# Altium PCB portaDAC.PcbDoc
Units mm, origin at the board's own origin, x right, y up, seen from the top; angles counter-clockwise.
Board outline 93 x 93 mm, 4 copper layers (Top Layer, Mid Layer 1, Mid Layer 2, Bottom Layer), stack 1.65 mm thick; 5 components, 1 nets, 296 pads, 0 vias.
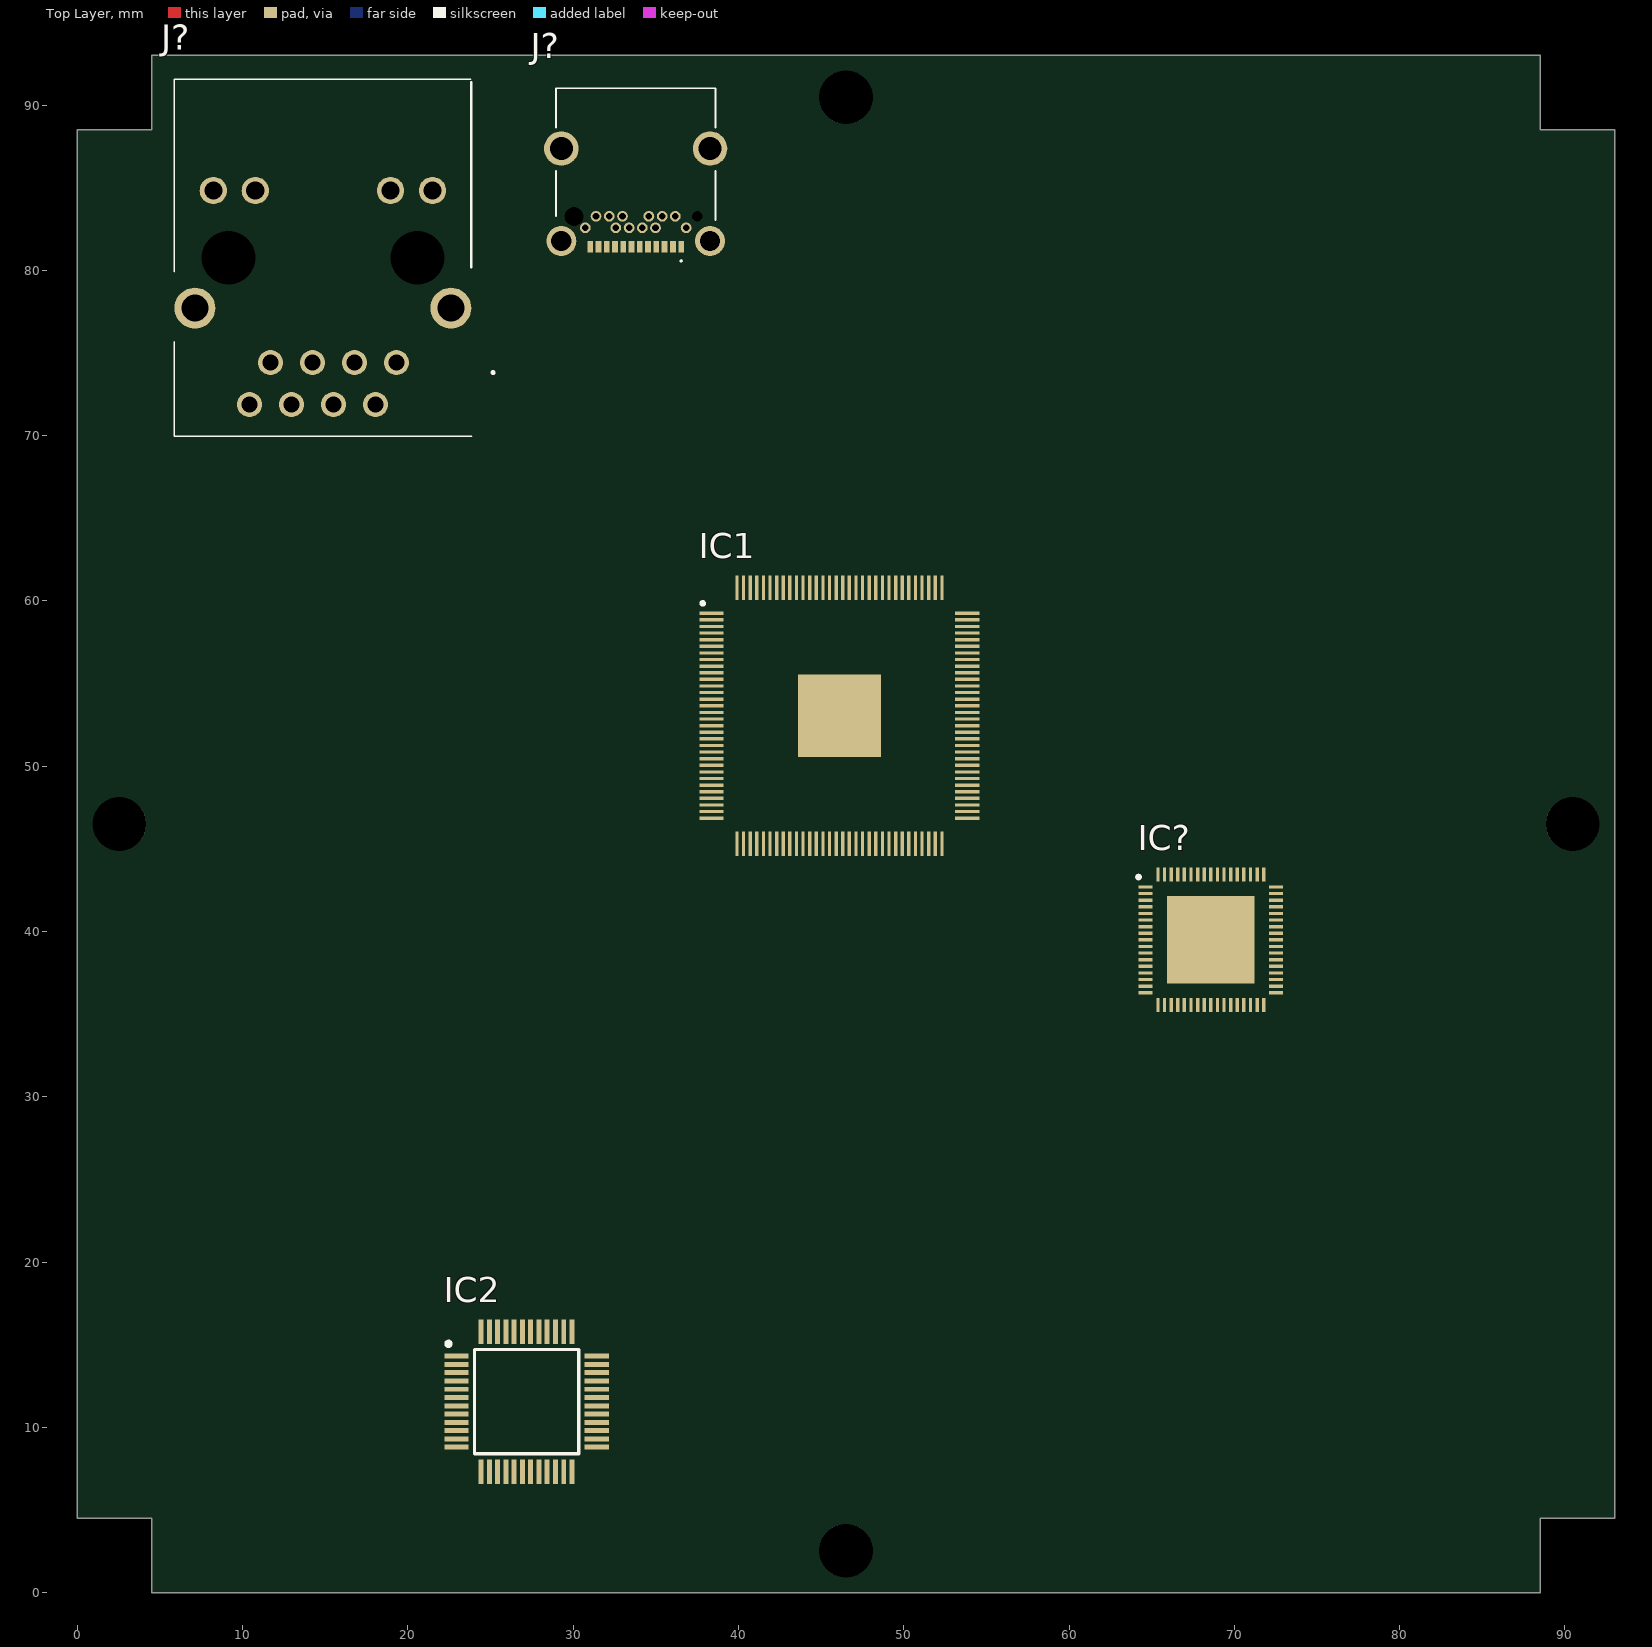
[diagram p0: Top Layer view]
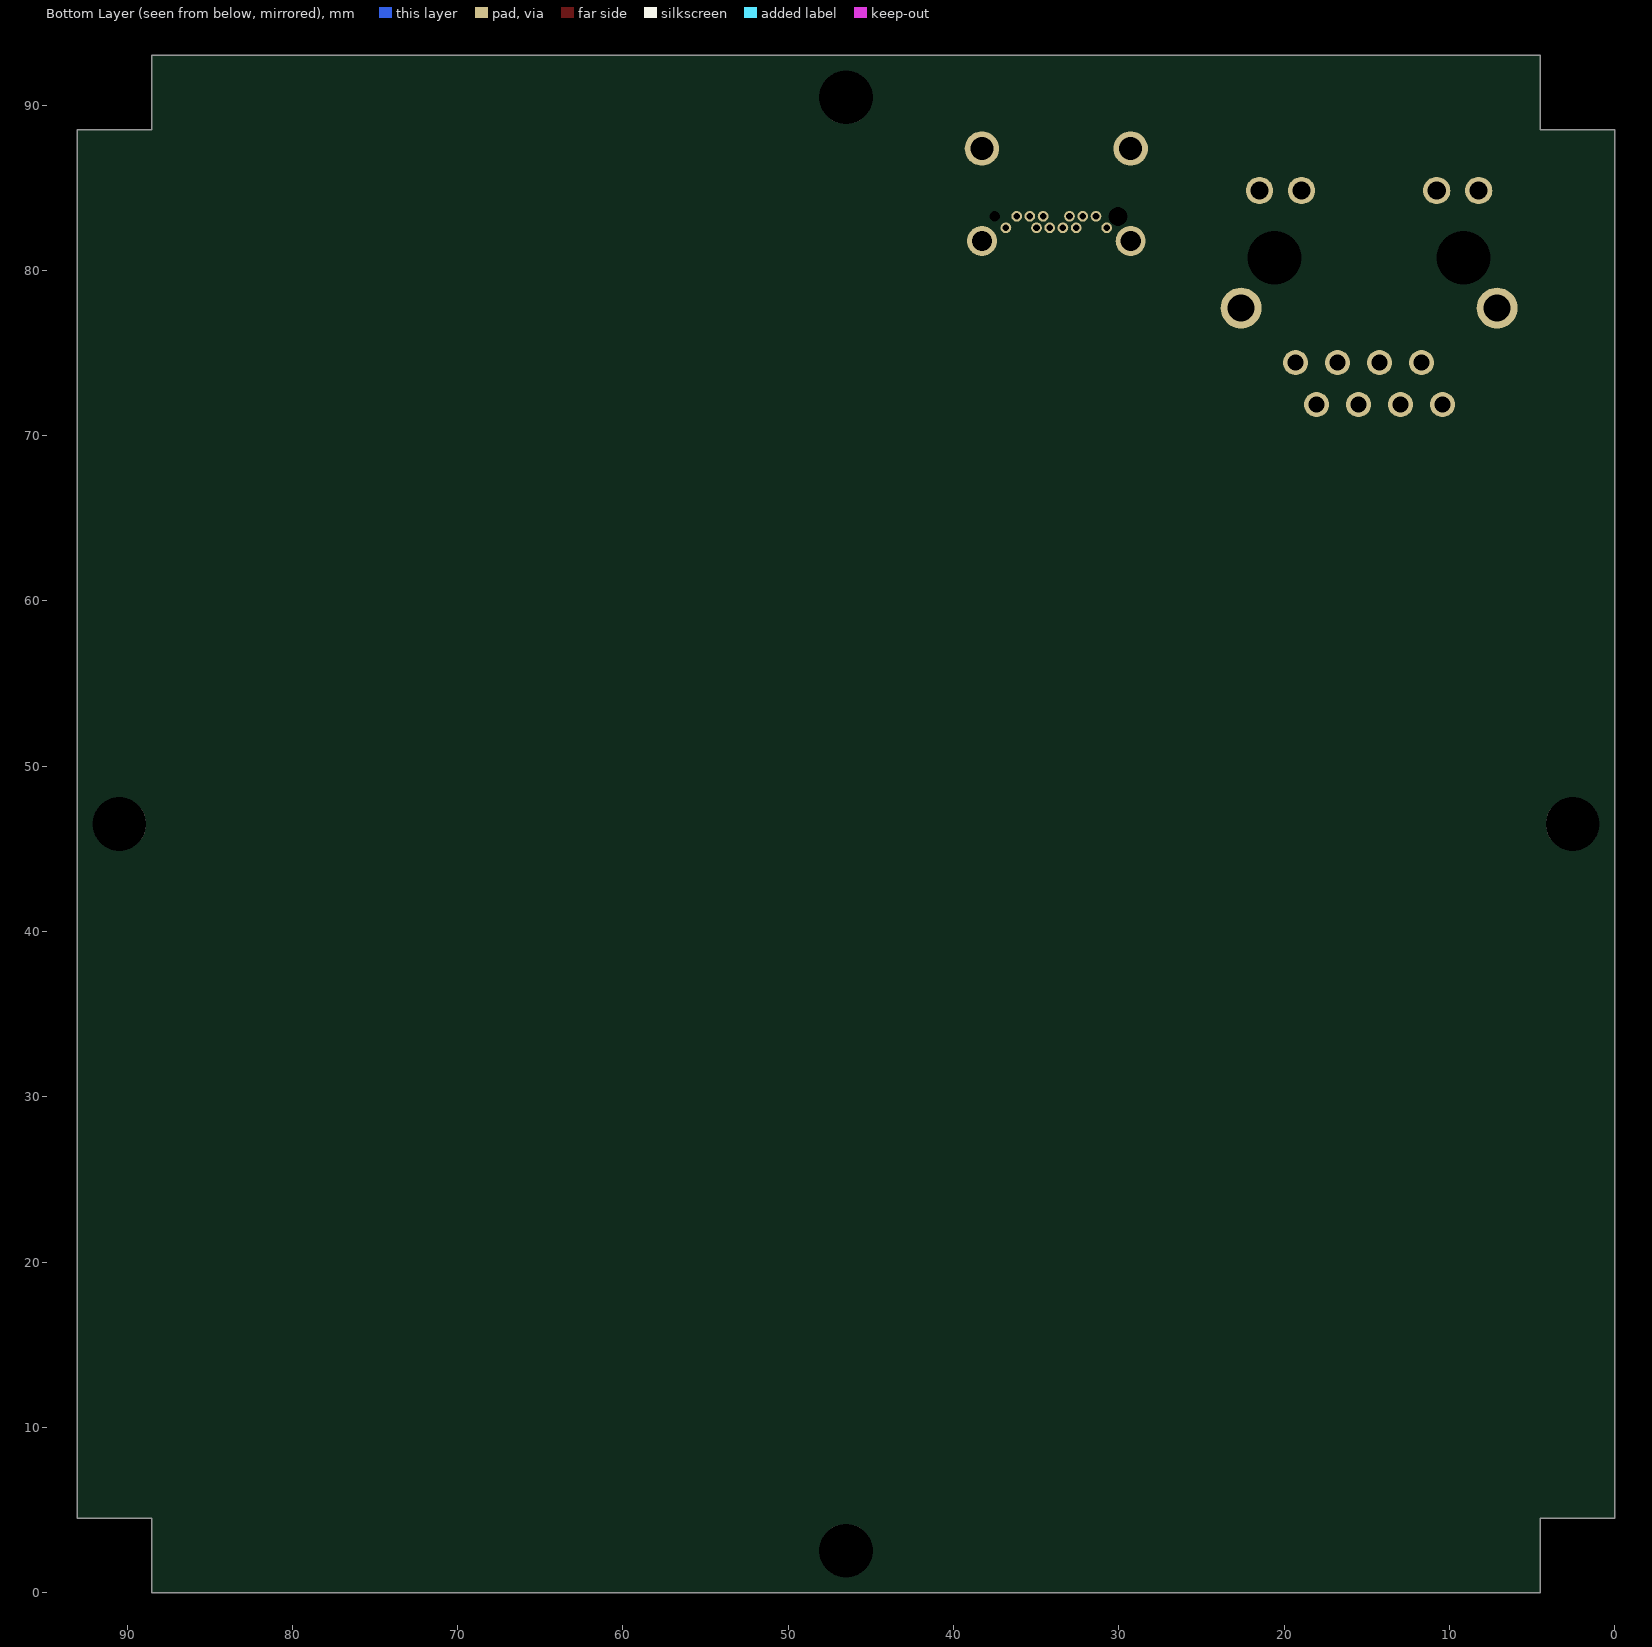
[diagram p1: Bottom Layer view, seen from below]

## Layer stack, top to bottom
Top Solder: solder mask 0.0127, Solder Resist, Dk 3.8
Top Layer: signal copper 0.075
Dielectric 1: prepreg 0.2, 7628, Dk 4.6
Mid Layer 1: signal copper 0.0175
Core: core 1.065, FR-4, Dk 4.5
Mid Layer 2: signal copper 0.0175
Dielectric 2: prepreg 0.2, 7628, Dk 4.6
Bottom Layer: signal copper 0.075
Bottom Solder: solder mask 0.0127, Solder Resist, Dk 3.8

## Board outline
4.506,0.006 4.506,4.506 0.006,4.506 0.006,88.506 4.506,88.506 4.506,93.006 88.506,93.006 88.506,88.506 93.006,88.506 93.006,4.506 88.506,4.506 88.506,0.006

## Design rules (kind name [scope] priority, off if disabled: settings)
BoardOutlineClearance [All] p1: gap=0.2 ignorepadtopadclearanceinfootprint=FALSE
Clearance ClearanceMidLayer1 [OnLayer('Mid Layer 1') Or IsVia Or IsThruPin vs OnLayer('Mid Layer 1')] p1: gap=0.102 ignorepadtopadclearanceinfootprint=FALSE except(0.127: Arc-Via Track-Via SMDPad-Via THPad-Via Via-Via Via-Fill Via-Poly Via-Region Via-Text; 0.25: Arc-Hole Track-Hole SMDPad-Hole THPad-Hole Via-Hole Fill-Hole Poly-Hole Region-Hole Text-Hole)
Clearance ClearanceTopLayer [OnLayer('Top Layer') Or IsVia Or IsThruPin vs OnLayer('Top Layer') Or IsVia Or IsThruPin] p2: gap=0.203 ignorepadtopadclearanceinfootprint=FALSE except(0.25: Arc-Hole Track-Hole SMDPad-Hole THPad-Hole Via-Hole Fill-Hole Poly-Hole Region-Hole Text-Hole)
Clearance ClearanceBottomLayer [OnLayer('Bottom Layer') Or IsVia Or IsThruPin vs OnLayer('Bottom Layer') Or IsVia Or IsThruPin] p3: gap=0.203 ignorepadtopadclearanceinfootprint=FALSE except(0.25: Arc-Hole Track-Hole SMDPad-Hole THPad-Hole Via-Hole Fill-Hole Poly-Hole Region-Hole Text-Hole)
Clearance ClearanceMidLayer2 [OnLayer('Mid Layer 2') Or IsVia Or IsThruPin vs OnLayer('Mid Layer 2')] p4: gap=0.102 ignorepadtopadclearanceinfootprint=FALSE except(0.127: Arc-Via Track-Via SMDPad-Via THPad-Via Via-Via Via-Fill Via-Poly Via-Region Via-Text; 0.25: Arc-Hole Track-Hole SMDPad-Hole THPad-Hole Via-Hole Fill-Hole Poly-Hole Region-Hole Text-Hole)
ComponentClearance [All] p1: gap=0.102 collisioncheckmode=3 verticalgap=0.102 showdistances=TRUE
DiffPairsRouting [All] p1: maxlimit=0.203 minlimit=0.102 mostfreqgap=0.203 toplayer_mingap=0.203 toplayer_minwidth=0.203 toplayer_maxwidth=1816.048 toplayer_prefwidth=0.203 midlayer1_maxgap=0.102 midlayer1_prefgap=0.102 midlayer1_minwidth=0.102 midlayer1_maxwidth=1816.048 midlayer1_prefwidth=0.102 midlayer2_maxgap=0.102 midlayer2_prefgap=0.102 midlayer2_minwidth=0.102 midlayer2_maxwidth=1816.048 midlayer2_prefwidth=0.102 bottomlayer_mingap=0.203 bottomlayer_minwidth=0.203 bottomlayer_maxwidth=1816.048 bottomlayer_prefwidth=0.203 maxuncoupledlength=12.7
Height [All] p1: minheight=0 maxheight=1816.048 prefheight=12.7
HoleSize [All] p1: absolutevalues=TRUE maxlimit=6.3 minlimit=0.2 maxpercent=80.000 minpercent=20.000
HoleToHoleClearance [All] p1: gap=0.25 allowstackedmicrovias=FALSE
MinimumAnnularRing [All] p1: minimumring=0.076
MinimumSolderMaskSliver [All] p1: minsoldermaskwidth=0
PlaneClearance PlaneClearanceMidLayer1 [OnLayer('Mid Layer 1')] p1: clearance=0.102
PlaneClearance PlaneClearanceMidLayer2 [OnLayer('Mid Layer 2')] p2: clearance=0.102
PlaneClearance PlaneClearanceTopLayer [OnLayer('Top Layer')] p3: clearance=0.203
PlaneClearance PlaneClearanceBottomLayer [OnLayer('Bottom Layer')] p4: clearance=0.203
PlaneConnect PlaneConnectPowerPads [InPadClass('PowerPads')] p1: planeconnectstyle=Direct reliefexpansion=0.508 reliefentries=4 reliefconductorwidth=0.254 reliefairgap=0.254
PlaneConnect PlaneConnectTopLayer [OnLayer('Top Layer')] p2: pad.planeconnectstyle=Relief pad.reliefexpansion=0.3 pad.reliefentries=4 pad.reliefconductorwidth=0.203 pad.reliefairgap=0.203 via.planeconnectstyle=Direct via.reliefexpansion=0.3 via.reliefentries=4 via.reliefconductorwidth=0.127 via.reliefairgap=0.127
PlaneConnect PlaneConnectBottomLayer [OnLayer('Bottom Layer')] p3: pad.planeconnectstyle=Relief pad.reliefexpansion=0.3 pad.reliefentries=4 pad.reliefconductorwidth=0.203 pad.reliefairgap=0.203 via.planeconnectstyle=Direct via.reliefexpansion=0.3 via.reliefentries=4 via.reliefconductorwidth=0.127 via.reliefairgap=0.127
PlaneConnect PlaneConnectMidLayer1 [OnLayer('Mid Layer 1')] p4: pad.planeconnectstyle=Relief pad.reliefexpansion=0.3 pad.reliefentries=4 pad.reliefconductorwidth=0.102 pad.reliefairgap=0.102 via.planeconnectstyle=Direct via.reliefexpansion=0.3 via.reliefentries=4 via.reliefconductorwidth=0.127 via.reliefairgap=0.127
PlaneConnect PlaneConnectMidLayer2 [OnLayer('Mid Layer 2')] p5: pad.planeconnectstyle=Relief pad.reliefexpansion=0.3 pad.reliefentries=4 pad.reliefconductorwidth=0.102 pad.reliefairgap=0.102 via.planeconnectstyle=Direct via.reliefexpansion=0.3 via.reliefentries=4 via.reliefconductorwidth=0.127 via.reliefairgap=0.127
PolygonConnect PolygonConnectPowerPads [All vs (InPadClass('PowerPads'))] p1: connectstyle=Direct reliefconductorwidth=0.254 reliefentries=4 polygonreliefangle="90 Angle" airgapwidth=0.254
PolygonConnect PolygonConnectMidLayer1 [OnLayer('Mid Layer 1') vs OnLayer('Mid Layer 1')] p2: thpad.connectstyle=Relief thpad.reliefconductorwidth=0.102 thpad.reliefentries=4 thpad.polygonreliefangle="90 Angle" thpad.airgapwidth=0.102 smdpad.connectstyle=Relief smdpad.reliefconductorwidth=0.102 smdpad.reliefentries=4 smdpad.polygonreliefangle="90 Angle" smdpad.airgapwidth=0.102 via.connectstyle=Direct via.reliefconductorwidth=0.127 via.reliefentries=4 via.polygonreliefangle="90 Angle" via.airgapwidth=0.127
PolygonConnect PolygonConnectMidLayer2 [OnLayer('Mid Layer 2') vs OnLayer('Mid Layer 2')] p3: thpad.connectstyle=Relief thpad.reliefconductorwidth=0.102 thpad.reliefentries=4 thpad.polygonreliefangle="90 Angle" thpad.airgapwidth=0.102 smdpad.connectstyle=Relief smdpad.reliefconductorwidth=0.102 smdpad.reliefentries=4 smdpad.polygonreliefangle="90 Angle" smdpad.airgapwidth=0.102 via.connectstyle=Direct via.reliefconductorwidth=0.127 via.reliefentries=4 via.polygonreliefangle="90 Angle" via.airgapwidth=0.127
PolygonConnect PolygonConnectTopLayer [OnLayer('Top Layer') vs OnLayer('Top Layer')] p4: thpad.connectstyle=Relief thpad.reliefconductorwidth=0.203 thpad.reliefentries=4 thpad.polygonreliefangle="90 Angle" thpad.airgapwidth=0.203 smdpad.connectstyle=Relief smdpad.reliefconductorwidth=0.203 smdpad.reliefentries=4 smdpad.polygonreliefangle="90 Angle" smdpad.airgapwidth=0.203 via.connectstyle=Direct via.reliefconductorwidth=0.127 via.reliefentries=4 via.polygonreliefangle="90 Angle" via.airgapwidth=0.127
PolygonConnect PolygonConnectBottomLayer [OnLayer('Bottom Layer') vs OnLayer('Bottom Layer')] p5: thpad.connectstyle=Relief thpad.reliefconductorwidth=0.203 thpad.reliefentries=4 thpad.polygonreliefangle="90 Angle" thpad.airgapwidth=0.203 smdpad.connectstyle=Relief smdpad.reliefconductorwidth=0.203 smdpad.reliefentries=4 smdpad.polygonreliefangle="90 Angle" smdpad.airgapwidth=0.203 via.connectstyle=Direct via.reliefconductorwidth=0.127 via.reliefentries=4 via.polygonreliefangle="90 Angle" via.airgapwidth=0.127
RoutingVias [All] p1: holewidth=0.2 width=0.45 viastyle="Through Hole" minholewidth=0.2 minwidth=0.45 maxholewidth=6.3 maxwidth=6.55
SilkToSilkClearance [All] p1: silktosilkclearance=0
SilkToSolderMaskClearance [IsPad] p1: minsilkscreentomaskgap=0.102 clearancetoexposedcopper=TRUE
SolderMaskExpansion [All] p1: expansion=0.075 istentingtop=FALSE
Width [All] p1: maxlimit=1816.048 minlimit=0.102 preferedwidth=0.203 toplayer_minwidth=0.203 midlayer1_prefwidth=0.102 midlayer2_prefwidth=0.102 bottomlayer_minwidth=0.203 minimp=50.000000 maximp=50.000000 favimp=50.000000
20 further rules are at their usual default settings.

## Classes and differential pairs
component class portaDAC: IC1 IC2 J?

## Components (designator, comment, footprint, x,y, rotation, side; value= is the part's Value field where it differs from the comment)
IC1 "XEF216-512-TQ128-C20" QFP40P1600X1600X120-129N 46.11,53.057 r0 top
IC2 "AK4493EQ" QFP50P900X900X160-48N 27.178,11.557 r0 top
IC? "VSC8541XMV-05" QFN40P800X800X90-69N-D 68.58,39.497 r0 top
J? "SS74800-132F" SS74800132F 19.304,74.422 r180 top
J? "UJ31-CH-G2-SMT-TR" UJ31CHG2SMTTR 33.782,87.376 r180 top

## Footprints (in the part's own frame and the unit in brackets; to place one, negate y for a bottom-side part, rotate by r counter-clockwise, add the part's x,y. Pads: shape width x height; smd on the part's side, far side on the other; paste and mask are expansions set on the pad)
QFN40P800X800X90-69N-D [mm]
  rect 0.85x0.2 smd: 1(-3.95,3.2) 2(-3.95,2.8) 3(-3.95,2.4) 4(-3.95,2) 5(-3.95,1.6) 6(-3.95,1.2) 7(-3.95,0.8) 8(-3.95,0.4) 9(-3.95,0) 10(-3.95,-0.4) 11(-3.95,-0.8) 12(-3.95,-1.2) 13(-3.95,-1.6) 14(-3.95,-2) 15(-3.95,-2.4) 16(-3.95,-2.8) 17(-3.95,-3.2) 35(3.95,-3.2) 36(3.95,-2.8) 37(3.95,-2.4) 38(3.95,-2) 39(3.95,-1.6) 40(3.95,-1.2) 41(3.95,-0.8) 42(3.95,-0.4) 43(3.95,0) 44(3.95,0.4) 45(3.95,0.8) 46(3.95,1.2) 47(3.95,1.6) 48(3.95,2) 49(3.95,2.4) 50(3.95,2.8) 51(3.95,3.2)
  rect 0.2x0.85 smd: 18(-3.2,-3.95) 19(-2.8,-3.95) 20(-2.4,-3.95) 21(-2,-3.95) 22(-1.6,-3.95) 23(-1.2,-3.95) 24(-0.8,-3.95) 25(-0.4,-3.95) 26(0,-3.95) 27(0.4,-3.95) 28(0.8,-3.95) 29(1.2,-3.95) 30(1.6,-3.95) 31(2,-3.95) 32(2.4,-3.95) 33(2.8,-3.95) 34(3.2,-3.95) 52(3.2,3.95) 53(2.8,3.95) 54(2.4,3.95) 55(2,3.95) 56(1.6,3.95) 57(1.2,3.95) 58(0.8,3.95) 59(0.4,3.95) 60(0,3.95) 61(-0.4,3.95) 62(-0.8,3.95) 63(-1.2,3.95) 64(-1.6,3.95) 65(-2,3.95) 66(-2.4,3.95) 67(-2.8,3.95) 68(-3.2,3.95)
  rect 5.3x5.3 smd: 69(0,0)
  silkscreen extent -4.47,3.7 -4.28,3.9, body extent -4.05,-4.05 4.05,4.05, height 0.9
QFP40P1600X1600X120-129N [mm]
  rect 1.475x0.2 smd: 1(-7.738,6.2) 2(-7.738,5.8) 3(-7.738,5.4) 4(-7.738,5) 5(-7.738,4.6) 6(-7.738,4.2) 7(-7.738,3.8) 8(-7.738,3.4) 9(-7.738,3) 10(-7.738,2.6) 11(-7.738,2.2) 12(-7.738,1.8) 13(-7.738,1.4) 14(-7.738,1) 15(-7.738,0.6) 16(-7.738,0.2) 17(-7.738,-0.2) 18(-7.738,-0.6) 19(-7.738,-1) 20(-7.738,-1.4) 21(-7.738,-1.8) 22(-7.738,-2.2) 23(-7.738,-2.6) 24(-7.738,-3) 25(-7.738,-3.4) 26(-7.738,-3.8) 27(-7.738,-4.2) 28(-7.738,-4.6) 29(-7.738,-5) 30(-7.738,-5.4) 31(-7.738,-5.8) 32(-7.738,-6.2) 65(7.738,-6.2) 66(7.738,-5.8) 67(7.738,-5.4) 68(7.738,-5) 69(7.738,-4.6) 70(7.738,-4.2) 71(7.738,-3.8) 72(7.738,-3.4) 73(7.738,-3) 74(7.738,-2.6) 75(7.738,-2.2) 76(7.738,-1.8) 77(7.738,-1.4) 78(7.738,-1) 79(7.738,-0.6) 80(7.738,-0.2) 81(7.738,0.2) 82(7.738,0.6) 83(7.738,1) 84(7.738,1.4) 85(7.738,1.8) 86(7.738,2.2) 87(7.738,2.6) 88(7.738,3) 89(7.738,3.4) 90(7.738,3.8) 91(7.738,4.2) 92(7.738,4.6) 93(7.738,5) 94(7.738,5.4) 95(7.738,5.8) 96(7.738,6.2)
  rect 0.2x1.475 smd: 33(-6.2,-7.738) 34(-5.8,-7.738) 35(-5.4,-7.738) 36(-5,-7.738) 37(-4.6,-7.738) 38(-4.2,-7.738) 39(-3.8,-7.738) 40(-3.4,-7.738) 41(-3,-7.738) 42(-2.6,-7.738) 43(-2.2,-7.738) 44(-1.8,-7.738) 45(-1.4,-7.738) 46(-1,-7.738) 47(-0.6,-7.738) 48(-0.2,-7.738) 49(0.2,-7.738) 50(0.6,-7.738) 51(1,-7.738) 52(1.4,-7.738) 53(1.8,-7.738) 54(2.2,-7.738) 55(2.6,-7.738) 56(3,-7.738) 57(3.4,-7.738) 58(3.8,-7.738) 59(4.2,-7.738) 60(4.6,-7.738) 61(5,-7.738) 62(5.4,-7.738) 63(5.8,-7.738) 64(6.2,-7.738) 97(6.2,7.738) 98(5.8,7.738) 99(5.4,7.738) 100(5,7.738) 101(4.6,7.738) 102(4.2,7.738) 103(3.8,7.738) 104(3.4,7.738) 105(3,7.738) 106(2.6,7.738) 107(2.2,7.738) 108(1.8,7.738) 109(1.4,7.738) 110(1,7.738) 111(0.6,7.738) 112(0.2,7.738) 113(-0.2,7.738) 114(-0.6,7.738) 115(-1,7.738) 116(-1.4,7.738) 117(-1.8,7.738) 118(-2.2,7.738) 119(-2.6,7.738) 120(-3,7.738) 121(-3.4,7.738) 122(-3.8,7.738) 123(-4.2,7.738) 124(-4.6,7.738) 125(-5,7.738) 126(-5.4,7.738) 127(-5.8,7.738) 128(-6.2,7.738)
  rect 5x5 smd: 129(0,0)
  silkscreen extent -8.37,6.7 -8.18,6.9, body extent -8,-8 8,8, height 1.2
QFP50P900X900X160-48N [mm]
  rect 1.475x0.3 smd: 1(-4.238,2.75) 2(-4.238,2.25) 3(-4.238,1.75) 4(-4.238,1.25) 5(-4.238,0.75) 6(-4.238,0.25) 7(-4.238,-0.25) 8(-4.238,-0.75) 9(-4.238,-1.25) 10(-4.238,-1.75) 11(-4.238,-2.25) 12(-4.238,-2.75) 25(4.238,-2.75) 26(4.238,-2.25) 27(4.238,-1.75) 28(4.238,-1.25) 29(4.238,-0.75) 30(4.238,-0.25) 31(4.238,0.25) 32(4.238,0.75) 33(4.238,1.25) 34(4.238,1.75) 35(4.238,2.25) 36(4.238,2.75)
  rect 0.3x1.475 smd: 13(-2.75,-4.238) 14(-2.25,-4.238) 15(-1.75,-4.238) 16(-1.25,-4.238) 17(-0.75,-4.238) 18(-0.25,-4.238) 19(0.25,-4.238) 20(0.75,-4.238) 21(1.25,-4.238) 22(1.75,-4.238) 23(2.25,-4.238) 24(2.75,-4.238) 37(2.75,4.238) 38(2.25,4.238) 39(1.75,4.238) 40(1.25,4.238) 41(0.75,4.238) 42(0.25,4.238) 43(-0.25,4.238) 44(-0.75,4.238) 45(-1.25,4.238) 46(-1.75,4.238) 47(-2.25,4.238) 48(-2.75,4.238)
  silkscreen extent -4.85,-3.15 3.15,3.62, body extent -4.5,-4.5 4.5,4.5, height 1.6
SS74800132F [mm]
  round 1.509 hole 0.97: 1(0,0) 2(1.27,2.54) 3(2.54,0) 4(3.81,2.54) 5(5.08,0) 6(6.35,2.54) 7(7.62,0) 8(8.89,2.54)
  round 1.65 hole 1.1: 9(-2.185,-10.41) 10(0.355,-10.41) 11(8.535,-10.41) 12(11.075,-10.41)
  round 2.475 hole 1.65: MH1(-3.3,-3.3) MH2(12.19,-3.3)
  round 1.625 hole 3.25 unplated: MH3(-1.27,-6.35) MH4(10.16,-6.35)
  silkscreen extent -5.9,-17.14 13.43,4.45, body extent -4.54,-17.14 13.43,4.45, height 15.31
UJ31CHG2SMTTR [mm]
  rect 0.35x0.7 smd: A1(-2.75,5.95) A2(-2.25,5.95) A3(-1.75,5.95) A4(-1.25,5.95) A5(-0.75,5.95) A6(-0.25,5.95) A7(0.25,5.95) A8(0.75,5.95) A9(1.25,5.95) A10(1.75,5.95) A11(2.25,5.95) A12(2.75,5.95)
  round 0.65 hole 0.4: B1(3.05,4.8) B2(2.4,4.1) B3(1.6,4.1) B4(1.2,4.8) B5(0.8,4.1) B6(0.4,4.8) B7(-0.4,4.8) B8(-0.8,4.1) B9(-1.2,4.8) B10(-1.6,4.1) B11(-2.4,4.1) B12(-3.05,4.8)
  round 0.575 hole 1.15 unplated: MH5(3.725,4.1)
  round 0.325 hole 0.65 unplated: MH6(-3.725,4.1)
  round 1.815 hole 1.22: S1(-4.5,5.6) S4(4.5,5.6)
  round 2.085 hole 1.393: S2(-4.5,0) S3(4.5,0)
  silkscreen extent -4.82,-3.65 4.82,6.85, body extent -4.86,-3.63 4.86,6.37, height 4.5

## Part data
IC1: "Integrated Circuit", Manufacturer_Name=XMOS, Datasheet Link=https://download.xmos.com/XM-007543-PC-10.pdf, Height=1.2mm, Manufacturer_Part_Number=XEF216-512-TQ128-C20
IC2: "Integrated Circuit", Manufacturer_Name=AKM, Arrow Part Number=AK4493EQ, Arrow Price/Stock=https://www.arrow.com/en/products/ak4493eq/asahi-kasei-microdevices-corporation, Datasheet Link=http://d.zaix.ru/5cHC.pdf, Height=1.6mm, Manufacturer_Part_Number=AK4493EQ
IC?: library part VSC8541XMV-02, "Integrated Circuit", Manufacturer_Name="Microsemi Corporation", Mouser Part Number=494-VSC8541XMV-05, Datasheet Link=https://ww1.microchip.com/downloads/en/DeviceDoc/VMDS-10513_VSC8541-02_VSC8541-05_Datasheet.pdf, Height=0.9mm, Manufacturer_Part_Number=VSC8541XMV-05, Mouser Price/Stock=https://www.mouser.com/ProductDetail/Microchip-Microsemi/VSC8541XMV-05?qs=byeeYqUIh0PEaQa1Vsi88A==
J?: "Connector", Manufacturer_Name="Stewart Connector", Mouser Part Number=530-SS74800-132F, Arrow Part Number=SS74800-132F, Arrow Price/Stock=https://www.arrow.com/en/products/ss74800-132f/bel-group, Datasheet Link=https://www.belfuse.com/resources/drawings/stewartconnector/dr-stw-ss74800-132f.pdf, Height=15.21mm, Manufacturer_Part_Number=SS74800-132F, Mouser Price/Stock=https://www.mouser.co.uk/ProductDetail/Stewart-Connector-Bel/SS74800-132F?qs=PzGy0jfpSMs%2Fug1%2FiHZ8KQ%3D%3D
J?: "Connector", Manufacturer_Name="CUI Inc.", Mouser Part Number=490-UJ31-CH-G2SMT-TR, Arrow Part Number=UJ31-CH-G2-SMT-TR, Arrow Price/Stock=https://www.arrow.com/en/products/uj31-ch-g2-smt-tr/cui-devices, Datasheet Link=https://www.arrow.com/en/products/uj31-ch-g2-smt-tr/cui-devices, Height=4.66mm, Manufacturer_Part_Number=UJ31-CH-G2-SMT-TR, Mouser Price/Stock=https://www.mouser.co.uk/ProductDetail/CUI-Devices/UJ31-CH-G2-SMT-TR?qs=W0yvOO0ixfGEsh2EYrPgIQ%3D%3D

## Free pads (board coordinates)
  round 3.2 hole 3.25: H1(2.542,46.506) H2(46.506,2.542) H3(90.471,46.506) H4(46.506,90.471)

## Nets (pads, with @x,y where several pads share a name; then routed paths per layer and width w, separated by ;. In a path a pad name is that pad's centre, name@x,y a point inside that pad or via, vN(x,y) a via of type N, cw(c..) or ccw(c..) an arc to the next point about the centre after c; other vN are vias at no path point)
GND: IC1.129
pads on no net: IC1.1 IC1.2 IC1.3 IC1.4 IC1.5 IC1.6 IC1.7 IC1.8 IC1.9 IC1.10 IC1.11 IC1.12 IC1.13 IC1.14 IC1.15 IC1.16 IC1.17 IC1.18 IC1.19 IC1.20 IC1.21 IC1.22 IC1.23 IC1.24 IC1.25 IC1.26 IC1.27 IC1.28 IC1.29 IC1.30 IC1.31 IC1.32 IC1.33 IC1.34 IC1.35 IC1.36 IC1.37 IC1.38 IC1.39 IC1.40 IC1.41 IC1.42 IC1.43 IC1.44 IC1.45 IC1.46 IC1.47 IC1.48 IC1.49 IC1.50 IC1.51 IC1.52 IC1.53 IC1.54 IC1.55 IC1.56 IC1.57 IC1.58 IC1.59 IC1.60 IC1.61 IC1.62 IC1.63 IC1.64 IC1.65 IC1.66 IC1.67 IC1.68 IC1.69 IC1.70 IC1.71 IC1.72 IC1.73 IC1.74 IC1.75 IC1.76 IC1.77 IC1.78 IC1.79 IC1.80 IC1.81 IC1.82 IC1.83 IC1.84 IC1.85 IC1.86 IC1.87 IC1.88 IC1.89 IC1.90 IC1.91 IC1.92 IC1.93 IC1.94 IC1.95 IC1.96 IC1.97 IC1.98 IC1.99 IC1.100 IC1.101 IC1.102 IC1.103 IC1.104 IC1.105 IC1.106 IC1.107 IC1.108 IC1.109 IC1.110 IC1.111 IC1.112 IC1.113 IC1.114 IC1.115 IC1.116 IC1.117 IC1.118 IC1.119 IC1.120 IC1.121 IC1.122 IC1.123 IC1.124 IC1.125 IC1.126 IC1.127 IC1.128 IC2.1 IC2.2 IC2.3 IC2.4 IC2.5 IC2.6 IC2.7 IC2.8 IC2.9 IC2.10 IC2.11 IC2.12 IC2.13 IC2.14 IC2.15 IC2.16 IC2.17 IC2.18 IC2.19 IC2.20 IC2.21 IC2.22 IC2.23 IC2.24 IC2.25 IC2.26 IC2.27 IC2.28 IC2.29 IC2.30 IC2.31 IC2.32 IC2.33 IC2.34 IC2.35 IC2.36 IC2.37 IC2.38 IC2.39 IC2.40 IC2.41 IC2.42 IC2.43 IC2.44 IC2.45 IC2.46 IC2.47 IC2.48 IC?.1 IC?.2 IC?.3 IC?.4 IC?.5 IC?.6 IC?.7 IC?.8 IC?.9 IC?.10 IC?.11 IC?.12 IC?.13 IC?.14 IC?.15 IC?.16 IC?.17 IC?.18 IC?.19 IC?.20 IC?.21 IC?.22 IC?.23 IC?.24 IC?.25 IC?.26 IC?.27 IC?.28 IC?.29 IC?.30 IC?.31 IC?.32 IC?.33 IC?.34 IC?.35 IC?.36 IC?.37 IC?.38 IC?.39 IC?.40 IC?.41 IC?.42 IC?.43 IC?.44 IC?.45 IC?.46 IC?.47 IC?.48 IC?.49 IC?.50 IC?.51 IC?.52 IC?.53 IC?.54 IC?.55 IC?.56 IC?.57 IC?.58 IC?.59 IC?.60 IC?.61 IC?.62 IC?.63 IC?.64 IC?.65 IC?.66 IC?.67 IC?.68 IC?.69 J?.1 J?.2 J?.3 J?.4 J?.5 J?.6 J?.7 J?.8 J?.9 J?.10 J?.11 J?.12 J?.A1 J?.A2 J?.A3 J?.A4 J?.A5 J?.A6 J?.A7 J?.A8 J?.A9 J?.A10 J?.A11 J?.A12 J?.B1 J?.B2 J?.B3 J?.B4 J?.B5 J?.B6 J?.B7 J?.B8 J?.B9 J?.B10 J?.B11 J?.B12 J?.MH1 J?.MH2 J?.MH3 J?.MH4 J?.MH5 J?.MH6 J?.S1 J?.S2 J?.S3 J?.S4

## Silkscreen, mask and mechanical layers (free items; w line width, h text height)
Mechanical 1:
  circle w0.013: c2.542,46.506 r2.25
  circle w0.013: c46.506,2.542 r2.25
  circle w0.013: c90.471,46.506 r2.25
  circle w0.013: c46.506,90.471 r2.25
  lines w0.013: 0.006,4.506 4.506,4.506 4.506,0.006 88.506,0.006 88.506,4.506 93.006,4.506 93.006,88.506 88.506,88.506 88.506,93.006 4.506,93.006 4.506,88.506 0.006,88.506 0.006,4.506